# Altium PCB PCB_main.PcbDoc
Units mm, origin at the board's own origin, x right, y up, seen from the top; angles counter-clockwise.
Board outline 55.25 x 26 mm, 2 copper layers (Top Layer, Bottom Layer); 26 components, 16 nets, 57 pads, 0 vias.
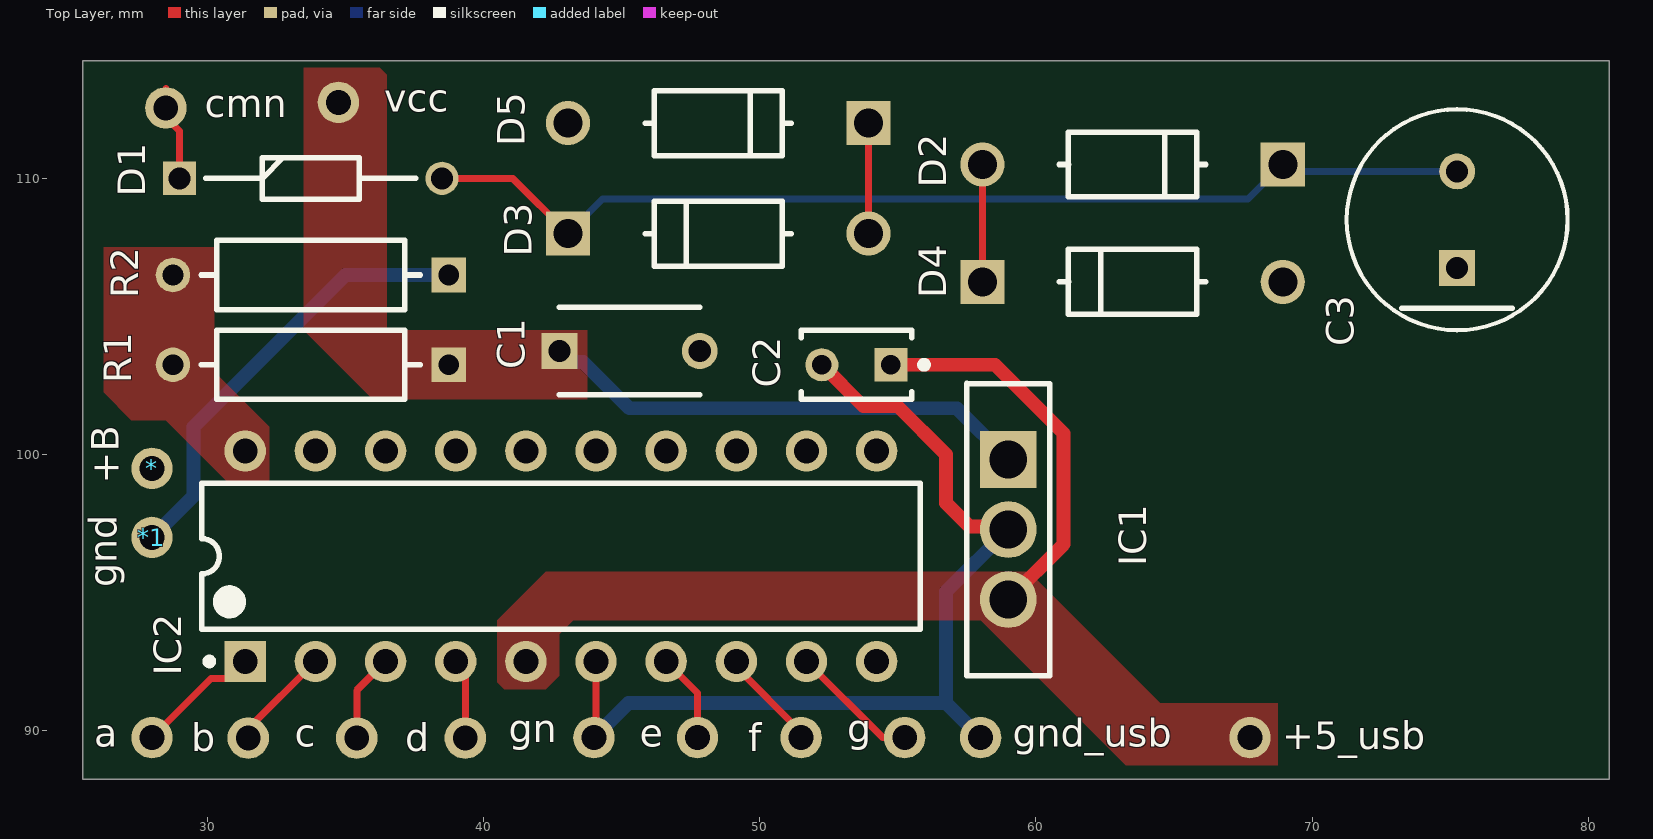
[diagram p0: Top Layer view]
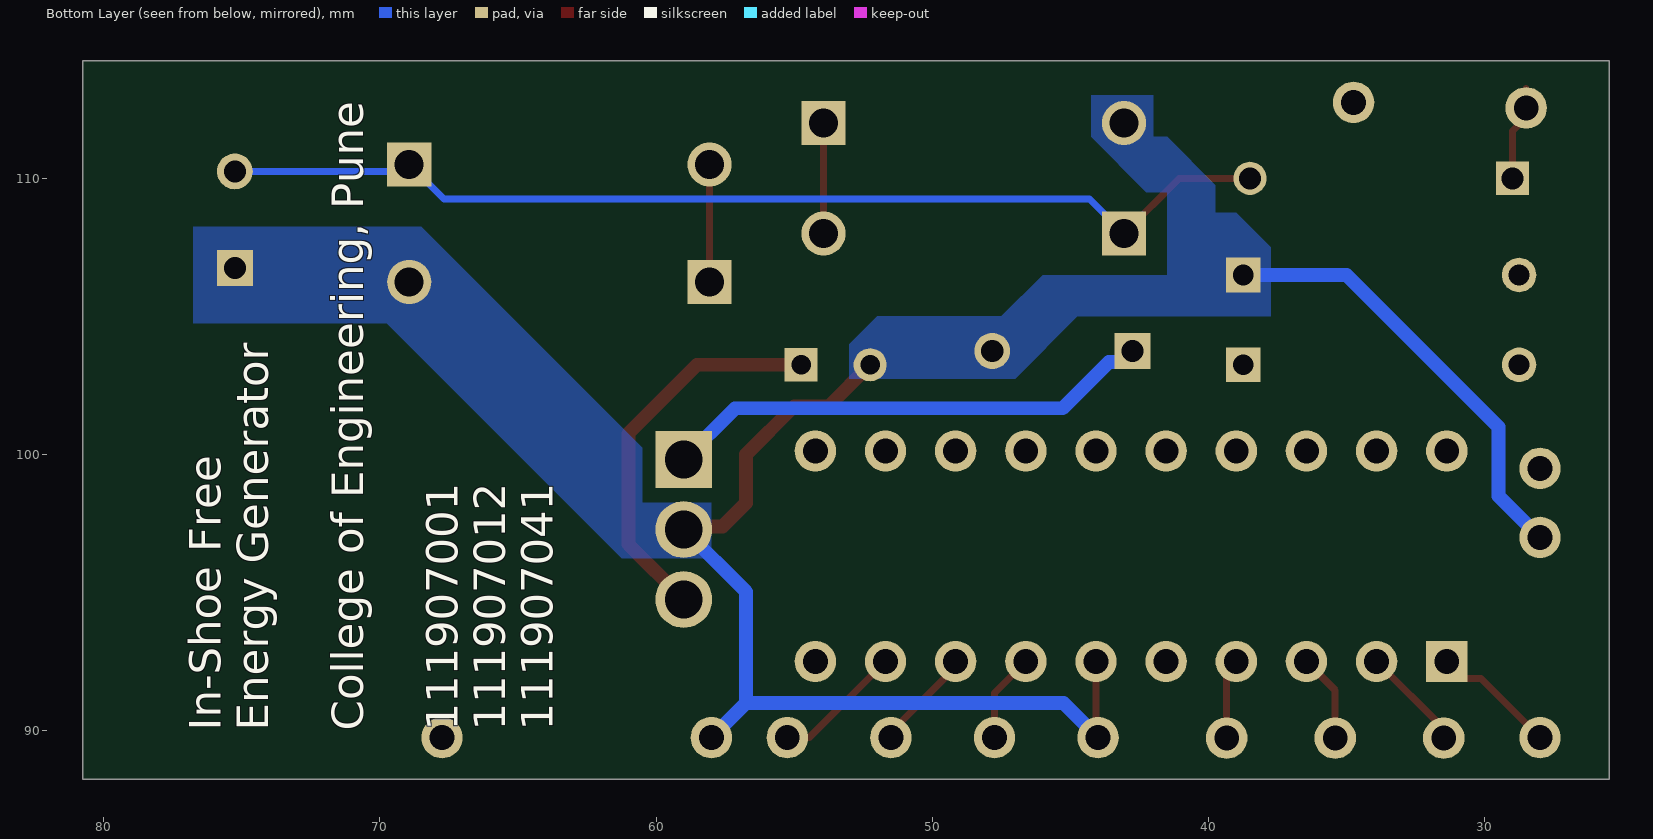
[diagram p1: Bottom Layer view, seen from below]
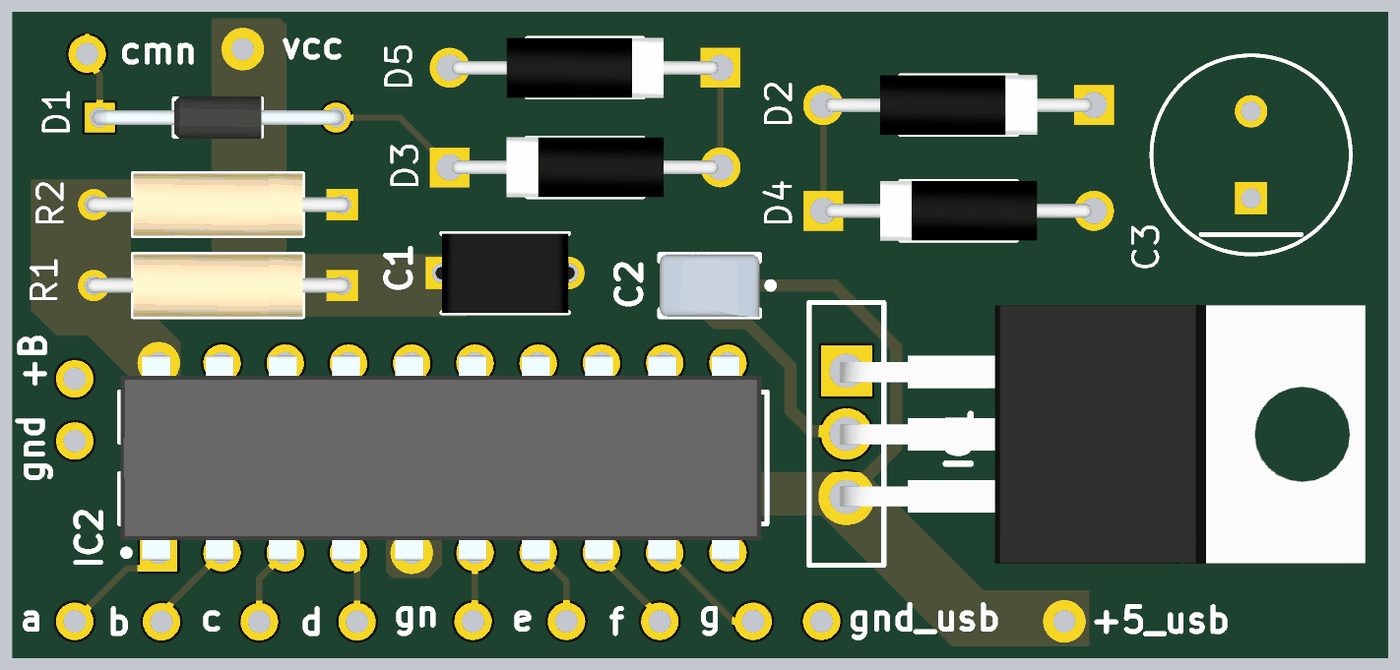
[diagram p2: 3D render of the assembled board from above, using the file's embedded part models]

## Layer stack, top to bottom
Top Solder: solder mask 0.0102, Solder Resist, Dk 3.5
Top Layer: signal copper 0.0356
Dielectric 1: dielectric 0.32, FR-4, Dk 4.8
Bottom Layer: signal copper 0.0356
Bottom Solder: solder mask 0.0102, Solder Resist, Dk 3.5

## Board outline
25.5,114.25 80.75,114.25 80.75,88.25 25.5,88.25

## Design rules (kind name [scope] priority, off if disabled: settings)
Clearance [All] p1: gap=0.254 ignorepadtopadclearanceinfootprint=FALSE except(0: Arc-Hole Track-Hole SMDPad-Hole THPad-Hole Via-Hole Fill-Hole Poly-Hole Region-Hole Text-Hole)
PolygonConnect [All] p1: connectstyle=Direct reliefconductorwidth=0.254 reliefentries=4 polygonreliefangle="90 Angle" airgapwidth=0.254
RoutingVias [All] p1: holewidth=0.711 width=1.27 viastyle="Through Hole" minholewidth=0.711 minwidth=1.27 maxholewidth=0.711 maxwidth=1.27
SolderMaskExpansion [All] p1: expansion=0.102 istentingtop=FALSE
Width power [(InNet('VCC') OR InNet('+5') OR InNet('GND') OR InNet('B+'))] p1: maxlimit=0.5 minlimit=0.254 preferedwidth=0.254
Width [All] p2: maxlimit=0.254 minlimit=0.254 preferedwidth=0.254
30 further rules are at their usual default settings.

## Classes and differential pairs
component class SCH_main: * +5_usb a b c C1 C2 C3 cmn d D1 D2 D3 D4 D5 e f g gn IC1 IC2 R1 R2 vcc

## Components (designator, comment, footprint, x,y, rotation, side; value= is the part's Value field where it differs from the comment)
* "Battery Pad" "BATTERY PAD" 28,99.5 r0 top
*1 "Battery Pad" "BATTERY PAD" 28,97 r0 top (schematic designator *)
+5_usb "Battery Pad" "BATTERY PAD" 67.75,89.75 r0 top (schematic designator bp9)
a "Battery Pad" "BATTERY PAD" 28,89.75 r0 top (schematic designator bp2)
b "Battery Pad" "BATTERY PAD" 31.485,89.733 r0 top (schematic designator bp1)
c "Battery Pad" "BATTERY PAD" 35.414,89.733 r0 top (schematic designator bp7)
C1 "Cap_Kemet_C322C334M5U5TA7301_eec" KEMET_C322C334M5U5TA7301_0 45.29,103.75 r0 top value=330nF
C2 "Cap_BC_Components_K104Z15Y5VF5TL2_eec" BC_COMPONENTS_K104Z15Y5VF5TL2_0 53.5,103.25 r180 top value=0.1µF
C3 "ECA-1CM471" PANASONIC_ECA-1_0 75.25,106.75 r90 top
cmn "Battery Pad" "BATTERY PAD" 28.5,112.552 r90 top (schematic designator bp11)
d "Battery Pad" "BATTERY PAD" 39.342,89.733 r0 top (schematic designator bp6)
D1 "SD103A-TR" DIOAD950W60L350D150 29,110 r0 top
D2 "Diode_Vishay_1N4007-E3-73_eec" VISHAY_1N4007-E3-73_0 63.5,110.5 r180 top
D3 "Diode_Vishay_1N4007-E3-73_eec" VISHAY_1N4007-E3-73_0 48.5,108 r0 top
D4 "Diode_Vishay_1N4007-E3-73_eec" VISHAY_1N4007-E3-73_0 63.5,106.25 r0 top
D5 "Diode_Vishay_1N4007-E3-73_eec" VISHAY_1N4007-E3-73_0 48.5,112 r180 top
e "Battery Pad" "BATTERY PAD" 47.75,89.75 r0 top (schematic designator bp5)
f "Battery Pad" "BATTERY PAD" 51.5,89.75 r0 top (schematic designator bp3)
g "Battery Pad" "BATTERY PAD" 55.25,89.75 r0 top (schematic designator bp4)
gn "Battery Pad" "BATTERY PAD" 44,89.75 r0 top (schematic designator bp8)
gnd_usb "Battery Pad" "BATTERY PAD" 58,89.75 r90 top (schematic designator bp10)
IC1 "LM7805CT" TO254P470X1016X2019-3P 59,99.82 r270 top
IC2 "ATtiny261A-PU" 20P3 42.806,96.319 r90 top
R1 "CFR25J100R" RESISTOR_TYCO_CFR25J100R_0 33.75,103.25 r180 top
R2 "CFR25J100R" RESISTOR_TYCO_CFR25J100R_0 33.75,106.5 r180 top
vcc "Battery Pad" "BATTERY PAD" 34.75,112.75 r90 top (schematic designator bp12)

## Footprints (in the part's own frame and the unit in brackets; to place one, negate y for a bottom-side part, rotate by r counter-clockwise, add the part's x,y. Pads: shape width x height; smd on the part's side, far side on the other; paste and mask are expansions set on the pad)
20P3 [mm] "DIP, 20-Pin, Row Spacing 7.62 mm, Pitch 2.54 mm"
  rect 1.5x1.5 hole 0.9: 1(-3.81,11.43)
  round 1.5 hole 0.9: 2(-3.81,8.89) 3(-3.81,6.35) 4(-3.81,3.81) 5(-3.81,1.27) 6(-3.81,-1.27) 7(-3.81,-3.81) 8(-3.81,-6.35) 9(-3.81,-8.89) 10(-3.81,-11.43) 11(3.81,-11.43) 12(3.81,-8.89) 13(3.81,-6.35) 14(3.81,-3.81) 15(3.81,-1.27) 16(3.81,1.27) 17(3.81,3.81) 18(3.81,6.35) 19(3.81,8.89) 20(3.81,11.43)
  silkscreen extent -3.93,-13 2.65,13, body extent -4.11,-12.78 4.11,12.96, height 5.33
"BATTERY PAD" [mm]
  round 1.5 hole 0.9 unplated: 1(0,0)
BC_COMPONENTS_K104Z15Y5VF5TL2_0 [mm]
  rect 1.2x1.2 hole 0.7 paste-1000 mask+0: 1(-1.25,0)
  round 1.2 hole 0.7 paste-1000 mask+0: 2(1.25,0)
  silkscreen extent -2.58,-1.25 2,1.25, body extent -2.1,-1.35 2.1,1.35, height 0.25
DIOAD950W60L350D150 [mm]
  rect 1.2x1.2 hole 0.8: 1(0,0)
  round 1.2 hole 0.8: 2(9.5,0)
  silkscreen extent 0.95,-0.75 8.55,0.75, body extent -0.3,-0.85 9.8,0.85, height 1.69
KEMET_C322C334M5U5TA7301_0 [mm]
  rect 1.3x1.3 hole 0.8 paste-1000 mask+0: 1(-2.54,0)
  round 1.3 hole 0.8 paste-1000 mask+0: 2(2.54,0)
  silkscreen extent -2.54,-1.59 2.54,1.59, body extent -3.29,-1.69 3.29,1.69, height 0.25
PANASONIC_ECA-1_0 [mm]
  rect 1.3x1.3 hole 0.8 paste-1000 mask+0: 1(0,0)
  round 1.3 hole 0.8 paste-1000 mask+0: 2(3.5,0)
  silkscreen extent -2.25,-4 5.75,4
RESISTOR_TYCO_CFR25J100R_0 [mm]
  rect 1.25x1.25 hole 0.75 paste-1000 mask+0: 1(-4.99,0)
  round 1.25 hole 0.75 paste-1000 mask+0: 2(4.99,0)
  silkscreen extent -3.96,-1.25 3.96,1.25, body extent -5.71,-1.35 5.71,1.35, height 0.25
TO254P470X1016X2019-3P [mm]
  rect 2.055x2.055 hole 1.37: 1(0,0)
  round 2.055 hole 1.37: 2(2.535,0) 3(5.07,0)
  silkscreen extent -2.75,-1.5 7.82,1.5, body extent -3,-0.25 8,20.85, height 5
VISHAY_1N4007-E3-73_0 [mm]
  rect 1.6x1.6 hole 1.05 paste-1000 mask+0: 1(-5.438,0)
  round 1.6 hole 1.05 paste-1000 mask+0: 2(5.438,0)
  silkscreen extent -2.65,-1.18 2.65,1.17, body extent -6.34,-1.45 6.34,1.45, height 0.25

## Part data
C1: "CAP CER 0.33UF 50V Z5U RADIAL", Capacitance=330nF, Digikey Part Number=399-9882-1-ND, Manufacturer=Kemet, Mouser Part Number=80-C322C334M5U-TR, Package=AXIAL, Part Number=C322C334M5U5TA7301, Temperature="-10°C to +85°C", Temperature Range High=+85°C, Temperature Range Low=-10°C, Voltage=50V, ComponentLink1Description=Upverter, ComponentLink1URL=https://upverter.com/upn/revision/a7e23f606e787d17/, ComponentLink2Description=Datasheet, ComponentLink2URL=http://www.mouser.com/ds/2/212/KEM_C1051_GOLDMAX_Z5U-1140498.pdf, Digikey Description="CAP CER 0.33UF 50V Z5U RADIAL", helpURL=https://upverter.com/upn/revision/a7e23f606e787d17/, Lead Free=yes, Price=0.206679296795, RoHS=TRUE, Supplier 1=Digi-Key, Supplier 2=Mouser, Supplier Part Number 1=399-9882-1-ND, Supplier Part Number 2=80-C322C334M5U-TR
C2: "CAP CER 0.1UF 50V Y5V RADIAL", Capacitance=0.1µF, Digikey Part Number=BC1160CT-ND, Manufacturer="BC Components", Mouser Part Number=594-K104Z15Y5VF5TL2, Package=RADIAL, Part Number=K104Z15Y5VF5TL2, Temperature="-30°C to +85°C", Temperature Range High=+85°C, Temperature Range Low=-30°C, Voltage=50V, ComponentLink1Description=Upverter, ComponentLink1URL=https://upverter.com/upn/revision/4dc92cb63de4f5f3/, ComponentLink2Description=Datasheet, ComponentLink2URL=https://upverter.com/datasheet/c2fb6937a55b84470fe4a5f67c9f6f24ab7ecd76.pdf, Digikey Description="CAP CER 0.1UF 50V Y5V RADIAL", helpURL=https://upverter.com/upn/revision/4dc92cb63de4f5f3/, Ipc Land Pattern Name=CAPRD250W70D400H400, Lead Free=yes, RoHS=TRUE, Supplier 1=Digi-Key, Supplier 2=Mouser, Supplier Part Number 1=BC1160CT-ND, Supplier Part Number 2=594-K104Z15Y5VF5TL2
D1: "Schottky Diode", Manufacturer_Name=Vishay, Mouser Part Number=625-SD103A, Arrow Part Number=SD103A-TR, Arrow Price/Stock=https://www.arrow.com/en/products/sd103a-tr/vishay, Datasheet Link=https://componentsearchengine.com/Datasheets/5/SD103A-TR.pdf, Manufacturer_Part_Number=SD103A-TR, Mouser Price/Stock=https://www.mouser.co.uk/ProductDetail/Vishay-Semiconductors/SD103A-TR?qs=RwahMLkpD2urFD%2FzZdGOBw%3D%3D
D2 D3 D4 D5: "DIODE GEN PURP 1KV 1A DO204AL", Digikey Part Number=1N4007-E3/73GICT-ND, Manufacturer=Vishay, Mouser Part Number=625-1N4007-E3/73, Package=DO-204AL, Part Number=1N4007-E3/73, Temperature="-50°C to +150°C", Temperature Range High=+150°C, Temperature Range Low=-50°C, ComponentLink1Description=Upverter, ComponentLink1URL=https://upverter.com/upn/revision/c7ff6a0a3bd206ca/, ComponentLink2Description=Datasheet, ComponentLink2URL=http://www.vishay.com/doc?88503, Digikey Description="DIODE GEN PURP 1KV 1A DO204AL", helpURL=https://upverter.com/upn/revision/c7ff6a0a3bd206ca/, Ipc Land Pattern Name=DIOPA775W110L464D237, Lead Free=yes, Price=0.107260195375, RoHS=TRUE, Supplier 1=Digi-Key, Supplier 2=Mouser, Supplier Part Number 1=1N4007-E3/73GICT-ND, Supplier Part Number 2=625-1N4007-E3/73
IC1: "Integrated Circuit", Manufacturer_Name="Texas Instruments", Mouser Part Number=926-LM7805CT, Arrow Part Number=LM7805CT, Arrow Price/Stock=https://www.arrow.com/en/products/lm7805ct/texas-instruments, Datasheet Link=http://www.ti.com/lit/ds/symlink/lm340.pdf, Height=4.7mm, Manufacturer_Part_Number=LM7805CT, Mouser Price/Stock=https://www.mouser.co.uk/ProductDetail/Texas-Instruments/LM7805CT/?qs=QbsRYf82W3EaqXeMDVwIfQ%3D%3D
IC2: library part ATTINY261A-PU, "8-bit AVR Microcontroller, 1.8-5.5V, 2KB Flash, 128 Bytes EEPROM, 128 Bytes SRAM, 20-pin PDIP, Industrial Grade (-40°C to 85°C), Pb-Free", Code_JEDEC=MS-001-AD, DatasheetVersion="revB, Jan-2010", PackageDescription="20-lead (0.300\"/7.62mm Wide) Plastic Dual Inline Package (PDIP)", PackageReference=20P3, PackageVersion="revC, Jan-2004", PartNumber=ATTINY261A-PU
R1 R2: "Carbon Film Resistors - Through Hole 100Ohm 1/3W 1200PPM", Case/Package=Axial, Manufacturer="TE Connectivity", Max Operating Temperature=155°C, Max Power Dissipation=333mW, Min Operating Temperature=-55°C, Number of Resistors=1, Power Rating=330mW, Resistance=100R, Resistance Tolerance=5%, Resistor Type="Thin Film", Temperature Coefficient=0ppm/°C, Voltage Rating=250V, Category="Through-Hole Resistors", ComponentLink1Description=https://datasheet.ciiva.com/11823/0900766b80098b49-11823335.pdf?src-supplier=RSComponents, ComponentLink1URL=https://datasheet.ciiva.com/11823/0900766b80098b49-11823335.pdf?src-supplier=RSComponents, ComponentLink2Description=https://datasheet.ciiva.com/24484/eng-ds-1773195-d-24484279.pdf?src-supplier=Onlinecomponents.com, ComponentLink2URL=https://datasheet.ciiva.com/24484/eng-ds-1773195-d-24484279.pdf?src-supplier=Onlinecomponents.com, ComponentLink3Description=https://datasheet.ciiva.com/22665/1723854-22665052.pdf?src-supplier=Element14, ComponentLink3URL=https://datasheet.ciiva.com/22665/1723854-22665052.pdf?src-supplier=Element14, Diameter=2.5mm, ELV=Compliant, Length=6.8mm, Manufacturer Part Number=CFR25J100R, Mount=Axial, Number of Terminations=2, Packaging="Tape and Reel", Pricing 1="10000=0.00800 (USD)", REACH SVHC="No SVHC", RoHS=Yes, RoHS Compliant=Yes, Series="CFR25, Neohm", Stock 1=3274, Supplier 1=Mouser, Technology="CARBON FILM", Termination=Axial, Tolerance=5%, Voltage Rating (DC)=250V

## Nets (pads, with @x,y where several pads share a name; then routed paths per layer and width w, separated by ;. In a path a pad name is that pad's centre, name@x,y a point inside that pad or via, vN(x,y) a via of type N, cw(c..) or ccw(c..) an arc to the next point about the centre after c; other vN are vias at no path point)
+5: +5_usb.1 C2.1 IC1.3 IC2.5 | length 14.4
  Top Layer w0.5: C2.1 58.522,103.25 61,100.772 61,96.75 IC1.3 ; +5_usb.1@67.5,89.75 +5_usb.1
+sch: cmn.1 D1.1 | length 3.5
  Top Layer w0.254: cmn.1@28.5,113.25 cmn.1 28.5,112.215 29,111.715 D1.1
-sch: C3.2 D1.2 D2.1 D3.1 | length 39.7
  Top Layer w0.254: D1.2 41.062,110 D3.1
  Bottom Layer w0.254: D3.1@42.389,108.673 D3.1 44.307,109.245 67.683,109.245 D2.1 69.188,110.25 C3.2
a: a.1 IC2.1 | length 4.5
  Top Layer w0.254: a.1 30.136,91.886 30.753,91.886 IC2.1
b: b.1 IC2.2 | length 3.8
  Top Layer w0.254: b.1 31.485,90.078 IC2.2
B+: *.1
c: c.1 IC2.3 | length 3.2
  Top Layer w0.254: c.1 35.414,91.467 IC2.3
d: d.1 IC2.4 | length 2.9
  Top Layer w0.254: IC2.4 39.342,92.162 d.1
e: e.1 IC2.7 | length 3.2
  Top Layer w0.254: IC2.7 47.75,91.374 e.1
f: f.1 IC2.8 | length 3.7
  Top Layer w0.254: IC2.8 49.156,92.302 51.5,89.957 f.1
g: g.1 IC2.9 | length 4.7
  Top Layer w0.254: IC2.9 54.454,89.75 g.1
GND: *1.1 C1.2 C2.2 C3.1 D4.2 D5.2 gn.1 gnd_usb.1 IC1.2 IC2.6 R2.1 | length 51.7
  Top Layer w0.254: gn.1 44.076,89.826 IC2.6
  Top Layer w0.5: C2.2 53.75,101.75 55,101.75 56.75,100 56.75,98.25 57.601,97.399 58.886,97.399 IC1.2 ; gnd_usb.1 gnd_usb.1@58,90.002
  Bottom Layer w0.5: *1.1 29.5,98.5 29.5,101 35,106.5 R2.1 ; gn.1 45.254,91.004 56.746,91.004 56.75,91 ; gnd_usb.1 56.75,91 ; IC1.2 56.75,95.035 56.75,91
ina: D2.2 D4.1 | length 4.3
  Top Layer w0.254: D4.1 D2.2
inb: D3.2 D5.1 | length 4
  Top Layer w0.254: D3.2 D5.1
NetIC2_20: IC2.20 R1.2 R2.2
VCC: C1.1 IC1.1 R1.1 vcc.1 | length 17.9
  Bottom Layer w0.5: C1.1 43.15,103.35 43.607,103.35 45.283,101.674 57.146,101.674 IC1.1
pads on no net: IC2.10 IC2.11 IC2.12 IC2.13 IC2.14 IC2.15 IC2.16 IC2.17 IC2.18 IC2.19

## Polygon pours and split planes (outlines as drawn)
VCC on Top Layer "VCC_L01_P006" (solid, remove dead copper, pour order 6): 33.5,114 36.25,114 36.5,113.75 36.5,104.5 43.75,104.5 43.75,102 36,102 33.5,104.5
VCC on Top Layer "VCC_L01_P005" (solid, remove dead copper, pour order 5): 33.25,113.75
+5 on Top Layer "+5_L01_P004" (solid, remove dead copper, pour order 4): 58,94 43.25,94 42.75,93.5 42.75,92 42.25,91.5 40.75,91.5 40.5,91.75 40.5,94 42.25,95.75 59.75,95.75 64.5,91 68.75,91 68.75,88.75 63.25,88.75
NetIC2_20 on Top Layer "NETIC2_20_L01_P001" (solid, remove dead copper, pour order 1): 26.25,107.5 26.25,102.25 27.25,101.25 28.5,101.25 30.75,99 32.25,99 32.25,101 30.25,103 30.25,107.5
NetIC2_20 on Top Layer "NETIC2_20_L01_P000" (solid, remove dead copper, pour order 0): 32.25,99.5
GND on Bottom Layer "GND_L02_P003" (solid, remove dead copper, pour order 3): 41.5,106.5 41.5,109.5 42.25,109.5 44.25,111.5 44.25,113 42,113 42,111.5 41.5,111.5 39.75,109.75 39.75,108.75 39,108.75 37.75,107.5 37.75,105 44.75,105 47,102.75 53,102.75 53,104 52,105 47.5,105 46,106.5
GND on Bottom Layer "GND_L02_P002" (solid, remove dead copper, pour order 2): 58,96.25 61.25,96.25 69.75,104.75 76.75,104.75 76.75,108.25 68.5,108.25 60.5,100.25 60.5,98.25 58,98.25

## Silkscreen, mask and mechanical layers (free items; w line width, h text height)
Top Overlay:
  text "+B" at 26.8,98.95 h1 r90
  text "gnd" at 26.717,95.2 h1 r90
Bottom Overlay:
  text "In-Shoe Free / Energy Generator /  / College of Engineering, Pune /  / 111907001 / 111907012 / 111907041" at 63.75,90 h1.14 r270